# EAGLE board flukso.sensor.board.v1.1 (EAGLE 5.04)
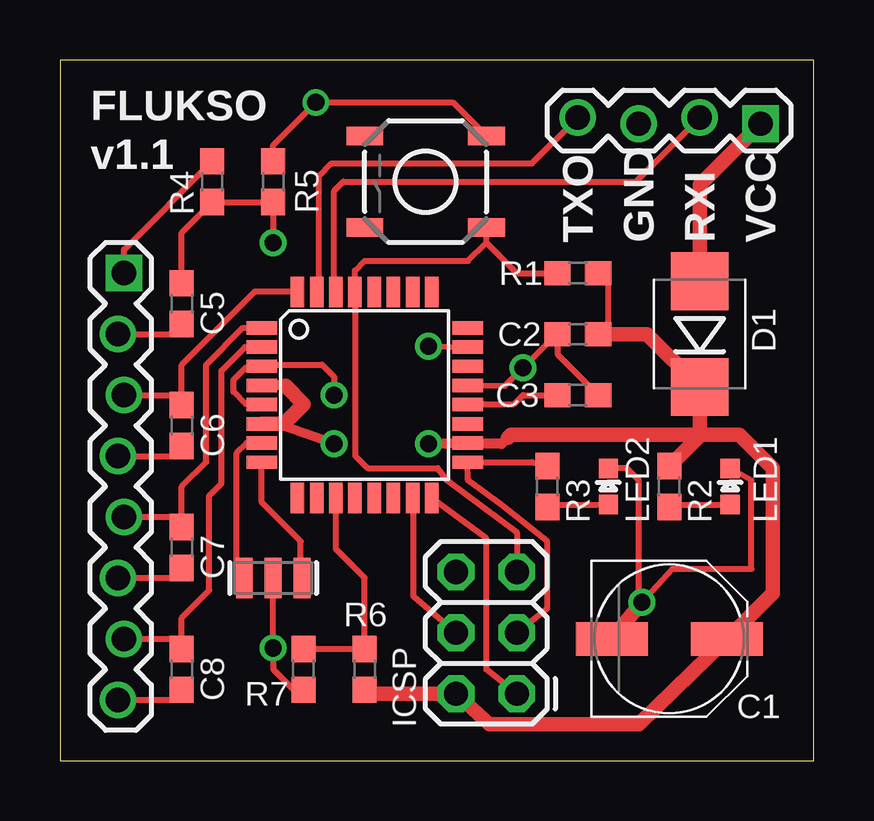
[diagram p0: board, top side]
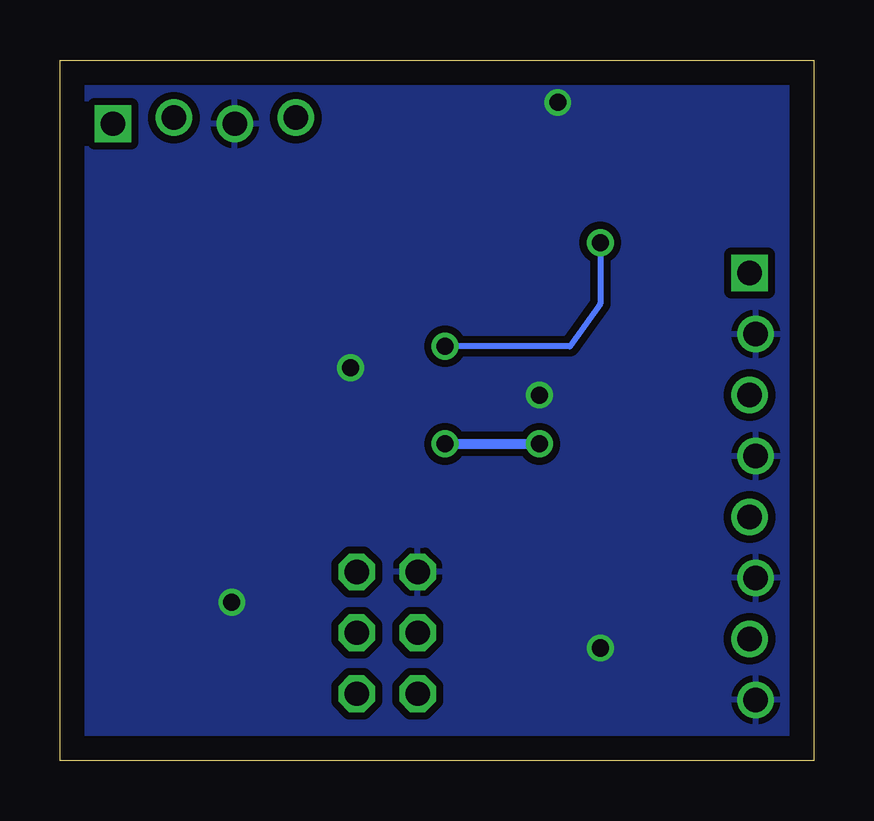
[diagram p1: board, bottom side, seen from below]

Size 31.42 x 29.2 mm. Coordinates in mm from the lower left corner, seen from the top.
Outline: 0,0 31.42,0 31.42,29.2 0,29.2 0,0
Copper layers (1*16): Top 0.035mm / dielectric 1.5mm / Bottom 0.035mm
Design rules "olimex.8mil": minimum track width 8mil, minimum drill 0.6mm, track to track 8mil, track to pad 8mil, pad to pad 8mil, via to via 8mil, smd to smd 8mil, copper to edge 40mil, drill to drill 10mil, minimum pad ring 10mil, minimum via ring 8mil, stop-mask expansion 0mil, vias tented up to drill 0mil, thermal gap 10mil

## Footprints (pad centres in the part's own frame; a part is rotated, then mirrored left to right if it is on the bottom)
PANASONIC_D = smd 3 x 1.4: + 2.4,0; - -2.4,0
0603 = smd 1.1 x 1: 1 -0.85,0; 2 0.85,0
SMB-DIODE = smd 2.4 x 2.4: A 2.2,0; C -2.2,0
2X3 = drill 1.016 octagon: 1 0,0; 2 0,2.54; 3 2.54,0; 4 2.54,2.54; 5 5.08,0; 6 5.08,2.54
1X08_LOCK = drill 1.016 square: 1 0,0.127 | drill 1.016 round: 2 2.54,-0.127; 3 5.08,0.127; 4 7.62,-0.127; 5 10.16,0.127; 6 12.7,-0.127; 7 15.24,0.127; 8 17.78,-0.127
LED-0603 = smd 0.8 x 0.8: A 0,-0.75; C 0,0.75
1X04_LOCK = drill 1.016 square: 1 0,0.127 | drill 1.016 round: 2 2.54,-0.127; 3 5.08,0.127; 4 7.62,-0.127
TACTILE_SWITCH_SMD = smd 1.524 x 0.762: 1 -2.54,1.905; 2 2.54,1.905; 3 -2.54,-1.905; 4 2.54,-1.905
TQFP32-08 = smd 1.27 x 0.559: 1 -4.293,2.8; 2 -4.293,2; 3 -4.293,1.2; 4 -4.293,0.4; 5 -4.293,-0.4; 6 -4.293,-1.2; 7 -4.293,-2; 8 -4.293,-2.8; 17 4.293,-2.8; 18 4.293,-2; 19 4.293,-1.2; 20 4.293,-0.4; 21 4.293,0.4; 22 4.293,1.2; 23 4.293,2; 24 4.293,2.8 | smd 0.559 x 1.27: 9 -2.8,-4.293; 10 -2,-4.293; 11 -1.2,-4.293; 12 -0.4,-4.293; 13 0.4,-4.293; 14 1.2,-4.293; 15 2,-4.293; 16 2.8,-4.293; 25 2.8,4.293; 26 2,4.293; 27 1.2,4.293; 28 0.4,4.293; 29 -0.4,4.293; 30 -1.2,4.293; 31 -2,4.293; 32 -2.8,4.293
RESONATOR-SMD = smd 0.7 x 1.7: 1 -1.2,0; 2 0,0; 3 1.2,0

## Placement (x,y rotation side)
C1  220uF  [PANASONIC_D]  25.4,5.08 0 top
C2  100nF  [0603]  21.59,17.78 180 top
C3  100nF  [0603]  21.59,15.24 0 top
C5  100nF  [0603]  5.08,19.05 270 top
C6  100nF  [0603]  5.08,13.97 270 top
C7  100nF  [0603]  5.08,8.89 270 top
C8  100nF  [0603]  5.08,3.81 270 top
D1  300mV  [SMB-DIODE]  26.67,17.78 90 top
ICSP  AVR_SPI_PRG_6PTH  [2X3]  19.05,2.79 90 top
INPUT  [1X08_LOCK]  2.54,20.32 270 top
LED1  red  [LED-0603]  27.94,11.43 0 top
LED2  green  [LED-0603]  22.86,11.43 0 top
LOGGER  [1X04_LOCK]  29.21,26.67 180 top
R1  10k  [0603]  21.59,20.32 0 top
R2  10k  [0603]  25.4,11.43 90 top
R3  10k  [0603]  20.32,11.43 90 top
R4  2M  [0603]  6.35,24.13 90 top
R5  562k  [0603]  8.89,24.13 270 top
R6  64.9k  [0603]  12.7,3.81 270 top
R7  37.4k  [0603]  10.16,3.81 90 top
S1  SWITCH-MOMENTARY-2SMD  [TACTILE_SWITCH_SMD]  15.24,24.13 180 top
U1  ATMEGA168  [TQFP32-08]  12.7,15.24 0 top
U2  RESONATORSMD  [RESONATOR-SMD]  8.89,7.62 0 top

## Library data of the parts
C1 = rcl
C2 C3 C5-C8 D1 ICSP INPUT LED1 LED2 LOGGER R1-R7 S1 U1 U2 = sparkFun

## Nets
GND: C1.- C2.2 C3.2 C5.2 C6.2 C7.2 C8.2 ICSP.6 INPUT.2 INPUT.4 INPUT.6 INPUT.8 LED1.C LED2.C LOGGER.3 R5.1 R7.1 S1.3 U1.3 U1.5 U1.21 U2.2
INPUT1: INPUT.1 R4.2
INPUT2: C6.1 INPUT.3 U1.32
INPUT3: C7.1 INPUT.5 U1.1
INPUT4: C8.1 INPUT.7 U1.2
LINE4: C5.1 R4.1 R5.2 U1.23
MISO: ICSP.1 U1.16
MOSI: ICSP.4 U1.15
N$1: R6.1 R7.2 U1.11
N$3: U1.7 U2.1
N$4: U1.8 U2.3
N$5: C3.1 U1.20
N$6: LED1.A R2.1
N$7: LED2.A R3.1
RAW: D1.A LOGGER.1
RESET: ICSP.5 R1.1 S1.1 U1.29
RXI: LOGGER.2 U1.30
SCK: ICSP.3 R3.2 U1.17
TXO: LOGGER.4 U1.31
VCC: C1.+ C2.1 D1.C ICSP.2 R1.2 R2.2 R6.2 U1.4 U1.6 U1.18

## Tracks (layer width: path | path; a pad name or v marks a point on that pad's centre or on a via)
GND  (via drill 0.71 pad 0.61)
  Top 0.254: INPUT.2 4.57,17.78 C5.2 | INPUT.4 4.7,12.7 C6.2 | INPUT.6 4.7,7.62 C7.2 | INPUT.8 4.7,2.54 C8.2 | U1.5 7.75,14.86 7.24,15.37 7.24,15.88 7.75,16.38 U1.3 8.89,16.51 10.92,16.51 11.43,16 v11.43,15.24 | U2.2 v8.89,4.7 8.89,3.81 9.74,2.96 R7.1 | LED1.C 28.83,11.68 28.83,8 25.53,8 v24.26,6.6 24.13,6.73 24.13,11.68 23.63,12.18 LED2.C | U1.21 18.54,15.62 v19.3,16.38 C2.2 20.74,16.94 C3.2 | R5.1 8.89,25.65 v10.67,27.43 16.38,27.43 S1.3
  Top 0.61: C1.- v24.26,6.6
  pour Bottom (isolate 0.305): 0,29.21 31.75,29.21 31.75,0 0,0
INPUT1
  Top 0.254: INPUT.1 2.67,21.3 R4.2
INPUT2
  Top 0.254: INPUT.3 5.08,15.24 | 5.08,15.24 C6.1 | 5.08,15.24 5.08,16.51 8.13,19.56 9.88,19.56 U1.32
INPUT3
  Top 0.254: 5.08,10.16 C7.1 | 5.08,10.16 5.08,11.43 6.1,12.45 6.1,16.51 7.62,18.03 U1.1 | INPUT.5 5.08,10.16
INPUT4
  Top 0.254: INPUT.7 4.7,5.08 C8.1 5.08,5.97 6.22,7.11 6.22,11.05 6.73,11.56 6.73,16.26 7.71,17.24 U1.2
LINE4  (via drill 0.71 pad 0.61)
  Top 0.254: v8.89,21.59 R5.2 R4.1 5.08,22.01 C5.1 | v15.37,17.27 U1.23
  Bottom 0.254: v8.89,21.59 8.89,19.05 10.16,17.27 v15.37,17.27
MISO
  Top 0.254: ICSP.1 17.78,3.81 17.78,9.27 U1.16
MOSI
  Top 0.254: ICSP.4 14.73,6.86 14.73,10.29 U1.15
N$1
  Top 0.254: U1.11 11.5,8.82 12.7,7.62 R6.1 R7.2
N$3
  Top 0.254: U2.1 7.37,8.26 7.37,12.83 7.78,13.24 U1.7
N$4
  Top 0.254: U1.8 8.41,10.77 10.03,9.14 10.03,7.68 U2.3
N$5
  Top 0.254: U1.20 17.65,14.86 18.92,14.86 19.3,15.24 C3.1
N$6
  Top 0.254: R2.1 25.91,10.67 27.43,10.67 LED1.A
N$7
  Top 0.254: R3.1 20.83,10.67 22.35,10.67 LED2.A
RAW
  Top 0.61: LOGGER.1 26.67,24 D1.A
RESET
  Top 0.254: ICSP.5 19.05,9.53 16.13,11.68 15.75,12.19 12.83,12.19 12.32,12.7 12.32,18.8 U1.29 12.3,20.43 12.7,20.83 17.02,20.83 17.78,21.59 | 17.78,21.59 S1.1 | 17.78,21.59 19.05,20.32 R1.1
RXI
  Top 0.254: U1.30 11.43,20.07 11.43,23.75 11.81,24.13 24,24.13 LOGGER.2
SCK
  Top 0.254: ICSP.3 20.32,6.35 20.32,9.14 18.41,10.67 17.02,11.68 U1.17 19.68,12.45 R3.2
TXO
  Top 0.254: U1.31 10.79,20.07 10.79,24.38 11.3,24.89 19.68,24.89 LOGGER.4
VCC  (via drill 0.71 pad 0.61)
  Top 0.254: R1.2 22.86,20.32 22.86,17.78 C2.1 | 13.1,2.79 12.87,2.79 R6.2
  Top 0.406: v15.37,13.21 16.13,13.21 U1.18 17.02,13.21 18.41,13.21 18.67,13.46 | v11.43,13.21 9.27,13.97 U1.6 | 9.4,15.62 9.38,15.64 U1.4
  Top 0.61: 26.67,13.59 26.67,13.55 R2.2 | 26.67,13.59 D1.C 24.47,17.78 C2.1 | 18.67,13.46 18.8,13.59 26.67,13.59 | 26.67,13.59 28.32,13.59 29.72,12.19 29.72,6.99 27.81,5.08 C1.+ 24.13,1.52 17.91,1.52 ICSP.2 13.1,2.79 | 9.4,15.62 10.16,14.86 9.34,14.04 U1.6
  Bottom 0.406: v15.37,13.21 v11.43,13.21

## Text on the board
tPlace: FLUKSO | v1.1 | TXO | GND | RXI | VCC